# Altium PCB ActuatorBoard.PcbDoc
Units mil, origin at the board's own origin, x right, y up, seen from the top; angles counter-clockwise.
Board outline 3130 x 1655 mil, 4 copper layers (Top, InternalPlane1, InternalPlane2, Bottom), stack 61.7 mil thick; 85 components, 70 nets, 361 pads, 135 vias.
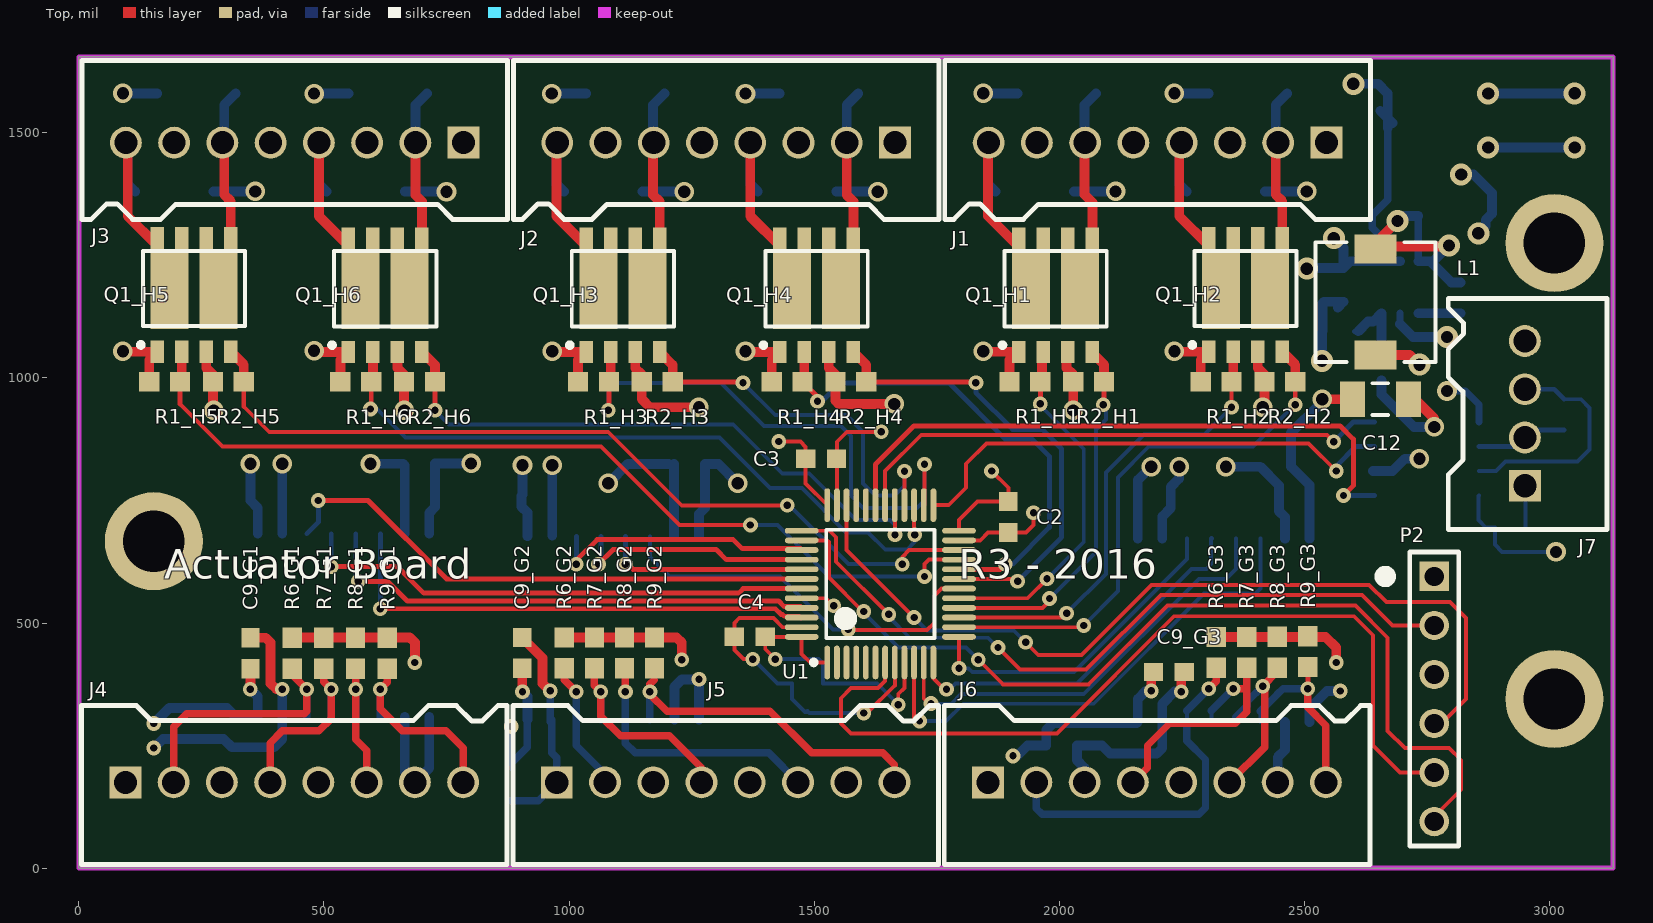
[diagram p0: Top view]
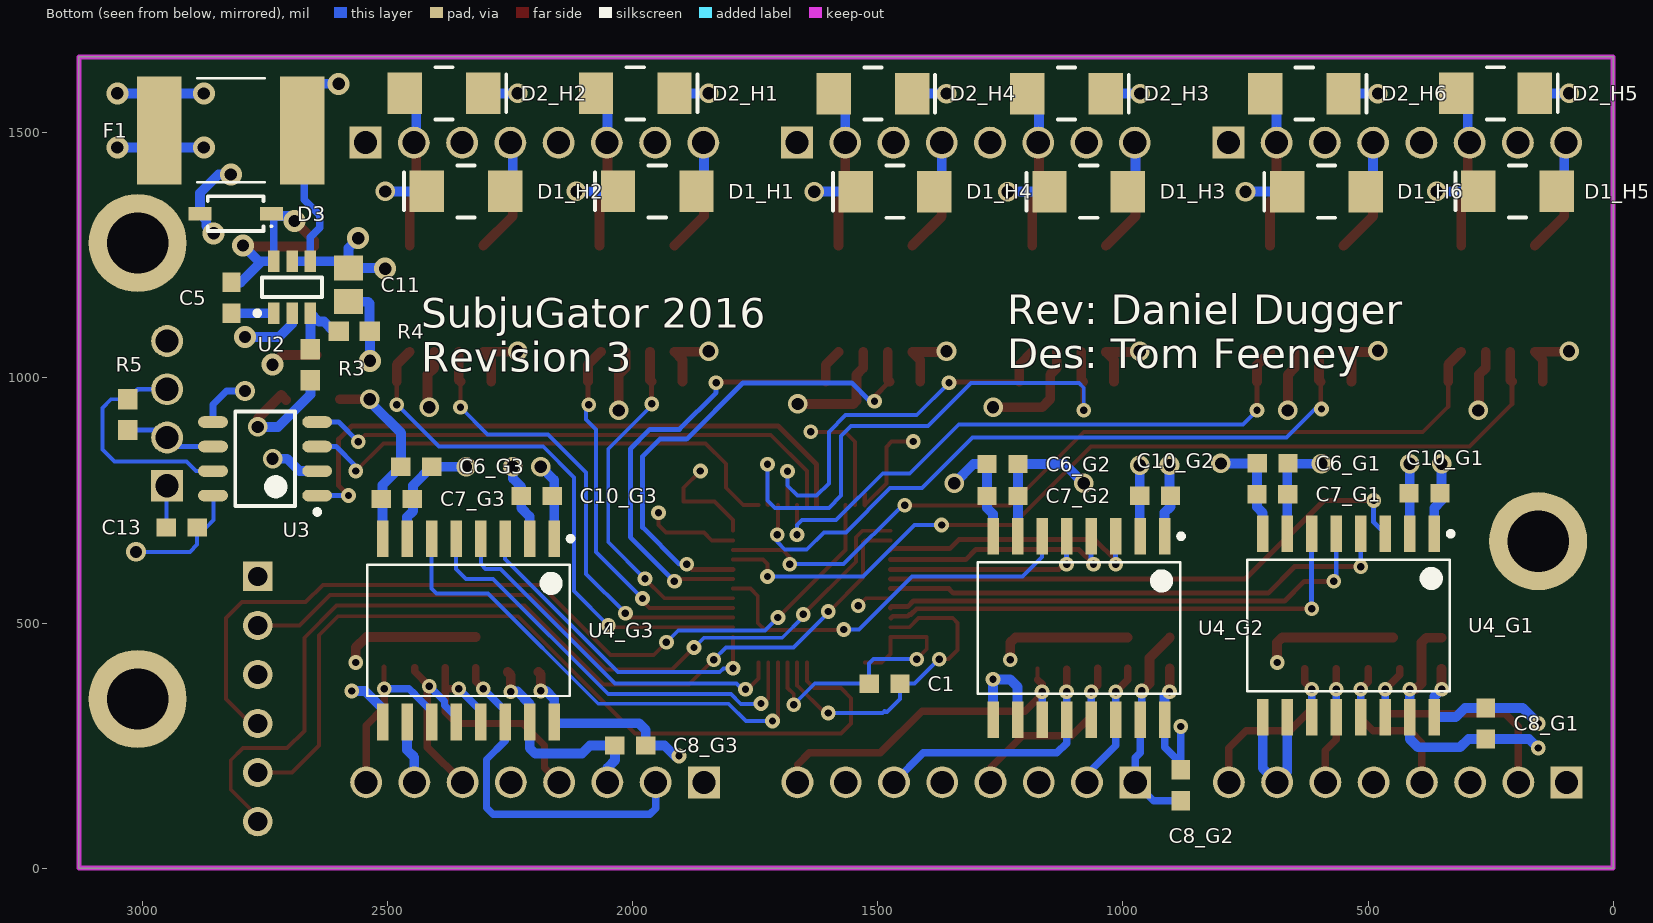
[diagram p1: Bottom view, seen from below]
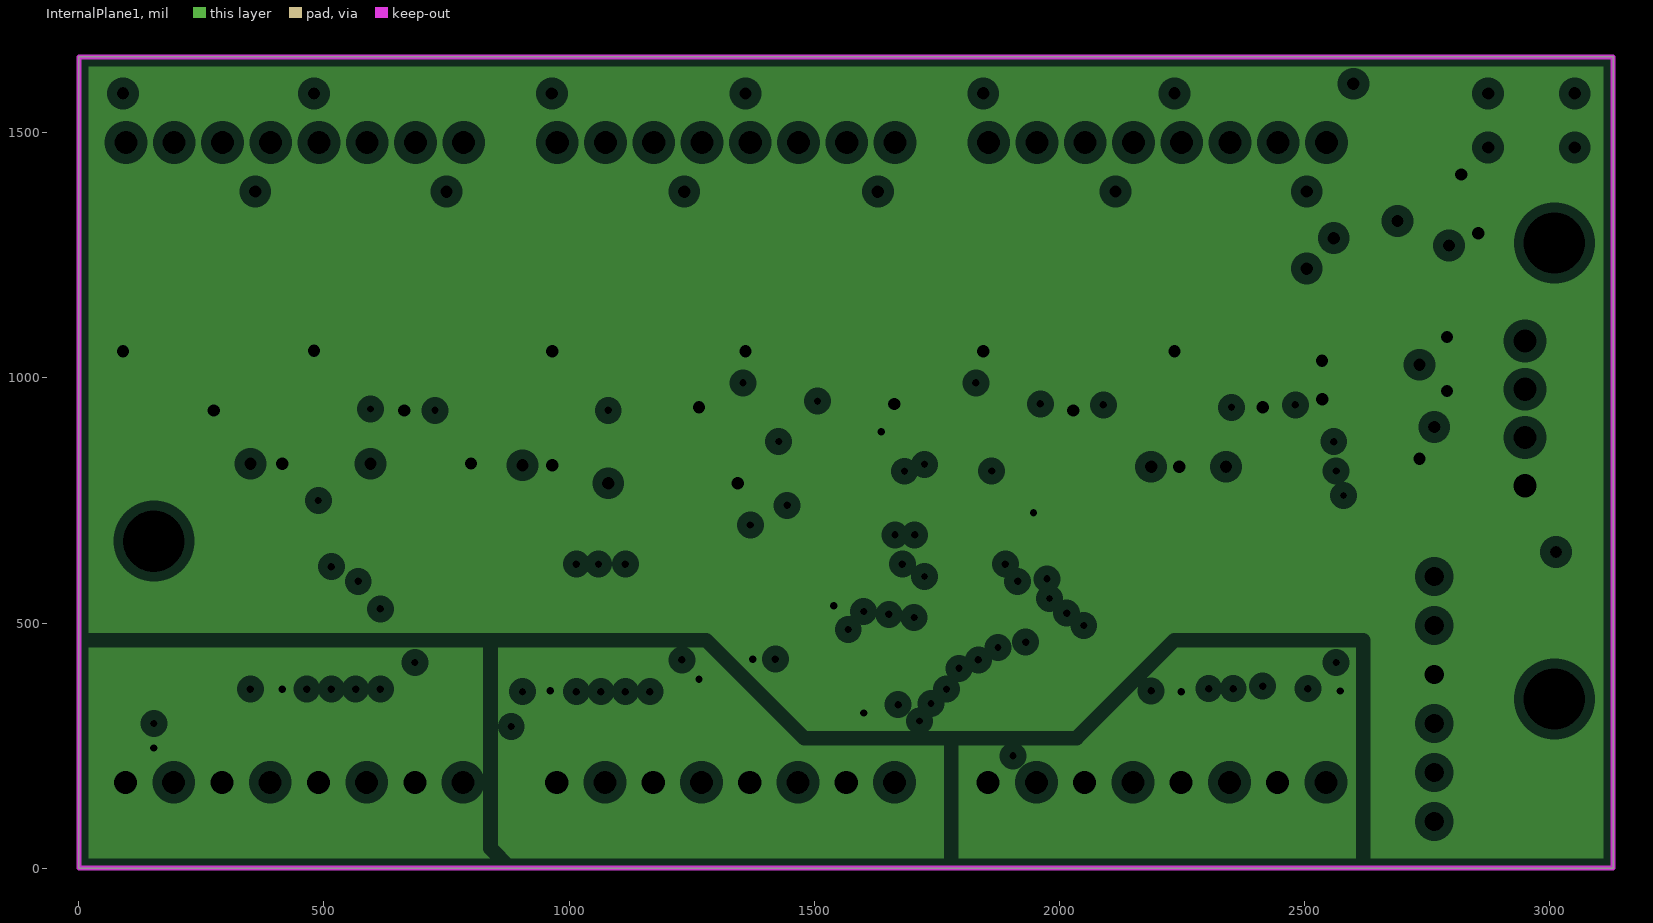
[diagram p2: InternalPlane1, clearances drawn from the general rule]
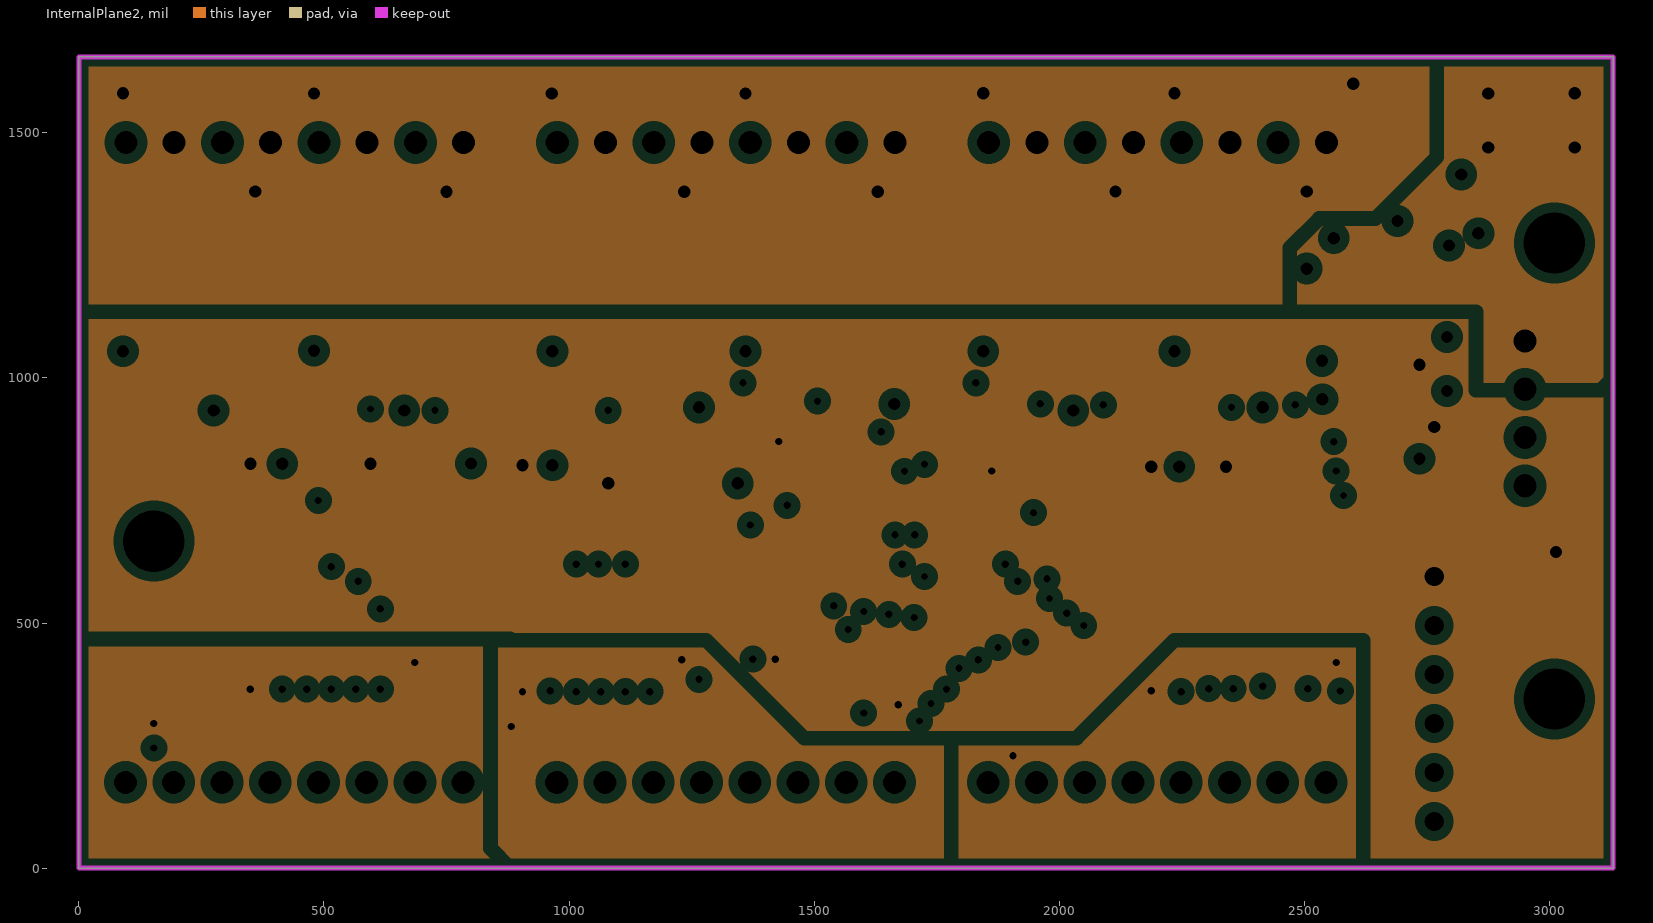
[diagram p3: InternalPlane2, clearances drawn from the general rule]

## Layer stack, top to bottom
Top Solder: solder mask 0.4, Solder Resist, Dk 3.5
Top: signal copper 0.675
Dielectric 1: prepreg 9.5, FR-4, Dk 4.2
InternalPlane1: plane copper 0.675, net (Multiple Nets)
Dielectric 3: core 40, FR-4, Dk 4.2
InternalPlane2: plane copper 0.675, net (Multiple Nets)
Dielectric 4: prepreg 9.5, FR-4, Dk 4.2
Bottom: signal copper 0.675
Bottom Solder: solder mask 0.4, Solder Resist, Dk 3.5

## Board outline
0,0 0,1655 3130,1655 3130,0

## Design rules (kind name [scope] priority, off if disabled: settings)
Clearance InnerClearance [(OnLayer('Ground Plane') OR OnLayer('Power Plane'))] p1: gap=12 ignorepadtopadclearanceinfootprint=FALSE except(0: Arc-Hole Track-Hole SMDPad-Hole THPad-Hole Via-Hole Fill-Hole Poly-Hole Region-Hole Text-Hole)
Clearance ViaClearance [IsVia vs IsVia] p2: gap=10 ignorepadtopadclearanceinfootprint=FALSE except(0: Arc-Hole Track-Hole SMDPad-Hole THPad-Hole Via-Hole Fill-Hole Poly-Hole Region-Hole Text-Hole)
Clearance AllClearance [All] p3: gap=6 ignorepadtopadclearanceinfootprint=FALSE except(0: Arc-Hole Track-Hole SMDPad-Hole THPad-Hole Via-Hole Fill-Hole Poly-Hole Region-Hole Text-Hole)
DiffPairsRouting [(InDifferentialPairClass('All Differential Pairs'))] p1: maxlimit=10 minlimit=6 mostfreqgap=6 toplayer_minwidth=6 toplayer_maxwidth=12 toplayer_prefwidth=10.9 bottomlayer_minwidth=6 bottomlayer_maxwidth=12 bottomlayer_prefwidth=10.9 maxuncoupledlength=500
HoleSize [All] p1: absolutevalues=TRUE maxlimit=250 minlimit=13 maxpercent=80.000 minpercent=20.000
HoleToHoleClearance [All] p1: gap=7 allowstackedmicrovias=FALSE
MinimumAnnularRing [All] p1: minimumring=7
MinimumSolderMaskSliver [All] p1 off: minsoldermaskwidth=10
PlaneClearance [All] p1: clearance=20
PlaneConnect [All] p1: planeconnectstyle=Relief reliefexpansion=8 reliefentries=4 reliefconductorwidth=15 reliefairgap=8
PolygonConnect [All] p1: connectstyle=Relief reliefconductorwidth=10 reliefentries=4 polygonreliefangle="90 Angle" airgapwidth=10
RoomDefinition G3 [InComponentClass('G3')] p1: confinementstyle=ConfineIn formatcopy=TRUE lockcomponents=FALSE outline 1924.75,877.69 1924.75,205 2565.31,205 2565.31,877.69
RoomDefinition G2 [InComponentClass('G2')] p2: confinementstyle=ConfineIn formatcopy=TRUE lockcomponents=FALSE outline 822.46,878.42 822.46,84.48 1315.31,84.48 1315.31,878.42
RoomDefinition G1 [InComponentClass('G1')] p3: confinementstyle=ConfineIn formatcopy=TRUE lockcomponents=FALSE outline 209.63,878.42 209.63,215 775.31,215 775.31,878.42
RoomDefinition H6 [InComponentClass('H6')] p4: confinementstyle=ConfineIn formatcopy=TRUE lockcomponents=FALSE outline 465,930 810,930 810,1655 465,1655
RoomDefinition H5 [InComponentClass('H5')] p5: confinementstyle=ConfineIn formatcopy=TRUE lockcomponents=FALSE outline 75,930.43 420,930.43 420,1655.43 75,1655.43
RoomDefinition H4 [InComponentClass('H4')] p6: confinementstyle=ConfineIn formatcopy=TRUE lockcomponents=FALSE outline 1345,930 1690,930 1690,1655 1345,1655
RoomDefinition H3 [InComponentClass('H3')] p7: confinementstyle=ConfineIn formatcopy=TRUE lockcomponents=FALSE outline 950,930 1295,930 1295,1655 950,1655
RoomDefinition H2 [InComponentClass('H2')] p8: confinementstyle=ConfineIn formatcopy=TRUE lockcomponents=FALSE outline 2220,930.43 2565,930.43 2565,1655.43 2220,1655.43
RoomDefinition H1 [InComponentClass('H1')] p9: confinementstyle=ConfineIn formatcopy=TRUE lockcomponents=FALSE outline 1830,930.43 2175,930.43 2175,1655.43 1830,1655.43
RoutingVias [All] p1: holewidth=15 width=25 viastyle="Through Hole" minholewidth=15 minwidth=25 maxholewidth=28 maxwidth=50
SilkToSilkClearance [All] p1: silktosilkclearance=5
SilkToSolderMaskClearance [IsPad] p1 off: minsilkscreentomaskgap=10 clearancetoexposedcopper=TRUE
SolderMaskExpansion [All] p1: expansion=4 useseparateexpansions=TRUE expansionbottom=4
Width [All] p1: maxlimit=20 minlimit=6 preferedwidth=8
22 further rules are at their usual default settings.

## Classes and differential pairs
net class A[11..0]: A0 A1 A2 A3 A4 A5 A6 A7 A8 A9 A10 A11
component class G1: C6_G1 C7_G1 C8_G1 C9_G1 C10_G1 R6_G1 R7_G1 R8_G1 R9_G1 U4_G1
component class H1: D1_H1 D2_H1 Q1_H1 R1_H1 R2_H1
component class H2: D1_H2 D2_H2 Q1_H2 R1_H2 R2_H2
channel class DualDriver: H1 H2 H3 H4 H5 H6
component class ActuatorTop: C1 C2 C3 C4 C5 C11 C12 C13 D3 F1 J1 J2 J3 J4 J5 J6 J7 L1 P2 R3 R4 R5 U1 U2 U3
component class H3: D1_H3 D2_H3 Q1_H3 R1_H3 R2_H3
component class H4: D1_H4 D2_H4 Q1_H4 R1_H4 R2_H4
component class H5: D1_H5 D2_H5 Q1_H5 R1_H5 R2_H5
component class H6: D1_H6 D2_H6 Q1_H6 R1_H6 R2_H6
component class G2: C6_G2 C7_G2 C8_G2 C9_G2 C10_G2 R6_G2 R7_G2 R8_G2 R9_G2 U4_G2
channel class Isolator: G1 G2 G3
net class B[11..0]: B0 B1 B2 B3 B4 B5 B6 B7 B8 B9 B10 B11
component class G3: C6_G3 C7_G3 C8_G3 C9_G3 C10_G3 R6_G3 R7_G3 R8_G3 R9_G3 U4_G3

## Components (designator, comment, footprint, x,y, rotation, side; value= is the part's Value field where it differs from the comment)
C1 "Cap" CAPC0603 1486.31,376.26 r180 bottom
C2 "Cap" CAPC0603 1896.07,716.26 r270 top
C3 "Cap" CAPC0603 1514.31,835.2 r0 top
C4 "Cap" CAPC0603 1368.7,471.73 r180 top
C5 "Cap" CAPC0603 2818.52,1163.37 r90 bottom
C6_G1 "Cap" CAPC0603 694.78,825.6 r180 bottom (schematic designator C6)
C6_G2 "Cap" CAPC0603 1245.78,824.46 r180 bottom (schematic designator C6)
C6_G3 "Cap" CAPC0603 2441.57,818.9 r180 bottom (schematic designator C6)
C7_G1 "Cap" CAPC0603 695.22,762.39 r180 bottom (schematic designator C7)
C7_G2 "Cap" CAPC0603 1245.78,758.99 r180 bottom (schematic designator C7)
C7_G3 "Cap" CAPC0603 2481.5,753 r180 bottom (schematic designator C7)
C8_G1 "Cap" CAPC0603 260,295 r90 bottom (schematic designator C8)
C8_G2 "Cap" CAPC0603 882.14,169.1 r90 bottom (schematic designator C8)
C8_G3 "Cap" CAPC0603 2005,250 r180 bottom (schematic designator C8)
C9_G1 "Cap" CAPC0603 350.21,438.33 r270 top (schematic designator C9)
C9_G2 "Cap" CAPC0603 904.38,439.01 r270 top (schematic designator C9)
C9_G3 "Cap" CAPC0603 2223.7,400.1 r180 top (schematic designator C9)
C10_G1 "Cap" CAPC0603 384.88,765.01 r0 bottom (schematic designator C10)
C10_G2 "Cap" CAPC0603 934.47,759.44 r0 bottom (schematic designator C10)
C10_G3 "Cap" CAPC0603 2195.98,758.99 r0 bottom (schematic designator C10)
C11 "Cap" CAPC0805 2580,1190 r90 bottom
C12 "Cap" CAPC1206 2655,956.5 r0 top
C13 "Cap" CAPC0603 2920,695 r0 bottom
D1_H1 "Schottky" SS110-TP 1950,1380.43 r180 bottom (schematic designator D1)
D1_H2 "Schottky" SS110-TP 2340,1380.43 r180 bottom (schematic designator D1)
D1_H3 "Schottky" SS110-TP 1070,1380 r180 bottom (schematic designator D1)
D1_H4 "Schottky" SS110-TP 1465,1380 r180 bottom (schematic designator D1)
D1_H5 "Schottky" SS110-TP 195,1380.43 r180 bottom (schematic designator D1)
D1_H6 "Schottky" SS110-TP 585,1380 r180 bottom (schematic designator D1)
D2_H1 "Schottky" SS110-TP 1995,1580.43 r0 bottom (schematic designator D2)
D2_H2 "Schottky" SS110-TP 2385,1580.43 r0 bottom (schematic designator D2)
D2_H3 "Schottky" SS110-TP 1115,1580 r0 bottom (schematic designator D2)
D2_H4 "Schottky" SS110-TP 1510,1580 r0 bottom (schematic designator D2)
D2_H5 "Schottky" SS110-TP 240,1580.43 r0 bottom (schematic designator D2)
D2_H6 "Schottky" SS110-TP 630,1580 r0 bottom (schematic designator D2)
D3 "Schottky" 1N5819HW-7-F 2810,1335 r0 bottom
F1 "PTC Fuse" PTC7451X11N 2820,1505 r180 bottom
J1 "MCV_0,5/8-G-2,5" MCV_0,5/8-G-2,5 2545,1480 r180 top
J2 "MCV_0,5/8-G-2,5" MCV_0,5/8-G-2,5 1665,1480 r180 top
J3 "MCV_0,5/8-G-2,5" MCV_0,5/8-G-2,5 785,1480 r180 top
J4 "MCV_0,5/8-G-2,5" MCV_0,5/8-G-2,5 95,175 r0 top
J5 "MCV_0,5/8-G-2,5" MCV_0,5/8-G-2,5 975,175 r0 top
J6 "MCV_0,5/8-G-2,5" MCV_0,5/8-G-2,5 1855,175 r0 top
J7 "MCV_0,5/4-G-2,5" MCV_0,5/4-G-2,5 2950,780 r90 top
L1 "Inductor" INDP6060X48N 2645.16,1154.74 r270 top
P2 "SWD" SWD_STM32 2765,595 r0 top
Q1_H1 "BUK9K134-100EX" NXP_SOT1205 1992.58,1181.97 r90 top (schematic designator Q1)
Q1_H2 "BUK9K134-100EX" NXP_SOT1205 2380,1182.4 r90 top (schematic designator Q1)
Q1_H3 "BUK9K134-100EX" NXP_SOT1205 1110,1181.97 r90 top (schematic designator Q1)
Q1_H4 "BUK9K134-100EX" NXP_SOT1205 1505,1181.97 r90 top (schematic designator Q1)
Q1_H5 "BUK9K134-100EX" NXP_SOT1205 235,1182.4 r90 top (schematic designator Q1)
Q1_H6 "BUK9K134-100EX" NXP_SOT1205 625,1181.97 r90 top (schematic designator Q1)
R1_H1 "Res" RES0603 1930,992.4 r180 top (schematic designator R1)
R1_H2 "Res" RES0603 2320,992.4 r180 top (schematic designator R1)
R1_H3 "Res" RES0603 1050,991.97 r180 top (schematic designator R1)
R1_H4 "Res" RES0603 1445,991.97 r180 top (schematic designator R1)
R1_H5 "Res" RES0603 175,992.4 r180 top (schematic designator R1)
R1_H6 "Res" RES0603 565,991.97 r180 top (schematic designator R1)
R2_H1 "Res" RES0603 2060,992.4 r180 top (schematic designator R2)
R2_H2 "Res" RES0603 2450,992.4 r180 top (schematic designator R2)
R2_H3 "Res" RES0603 1180,991.97 r180 top (schematic designator R2)
R2_H4 "Res" RES0603 1575,991.97 r180 top (schematic designator R2)
R2_H5 "Res" RES0603 305,992.4 r180 top (schematic designator R2)
R2_H6 "Res" RES0603 695,991.97 r180 top (schematic designator R2)
R3 "Res" RES0603 2657.6,1026.91 r270 bottom
R4 "Res" RES0603 2568.27,1095 r180 bottom
R5 "Res" RES0603 3030,925 r270 bottom
R6_G1 "Res" RES0603 435.25,438.33 r270 top (schematic designator R6)
R6_G2 "Res" RES0603 990.49,439.01 r270 top (schematic designator R6)
R6_G3 "Res" RES0603 2320.16,440.13 r270 top (schematic designator R6)
R7_G1 "Res" RES0603 499.82,438.33 r270 top (schematic designator R7)
R7_G2 "Res" RES0603 1051.79,439.01 r270 top (schematic designator R7)
R7_G3 "Res" RES0603 2382.49,440.13 r270 top (schematic designator R7)
R8_G1 "Res" RES0603 564.39,438.33 r270 top (schematic designator R8)
R8_G2 "Res" RES0603 1113.09,439.01 r270 top (schematic designator R8)
R8_G3 "Res" RES0603 2444.82,440.25 r270 top (schematic designator R8)
R9_G1 "Res" RES0603 628.96,438.33 r270 top (schematic designator R9)
R9_G2 "Res" RES0603 1174.38,439.01 r270 top (schematic designator R9)
R9_G3 "Res" RES0603 2507.14,441.58 r270 top (schematic designator R9)
U1 "STM32F072CB" STM32F072CB 1635,580 r90 top
U2 "LMR14203" SOT95P280X110-6N 2695,1185 r90 bottom
U3 "MAX14840EASA+" MAX14840EASA+ 2750,835 r0 bottom
U4_G1 "ADUM6404" SOIC127P1030X265-16N 540,495 r270 bottom (schematic designator U4)
U4_G2 "ADUM6404" SOIC127P1030X265-16N 1090,490 r270 bottom (schematic designator U4)
U4_G3 "ADUM6404" SOIC127P1030X265-16N 2335.31,485 r270 bottom (schematic designator U4)

## Footprints (in the part's own frame and the unit in brackets; to place one, negate y for a bottom-side part, rotate by r counter-clockwise, add the part's x,y. Pads: shape width x height; smd on the part's side, far side on the other; paste and mask are expansions set on the pad)
1N5819HW-7-F [mm] "DIODE SCHOTTKY 40V 1A SOD123"
  rect 1.2x0.7 smd: A(1.85,0) C(-1.85,0)
  silkscreen extent -1.9,-0.9 1.45,0.9, body extent -1.42,-0.85 1.43,0.85, height 1.35
CAPC0603 [mm] "Chip Capacitor, 2-Leads, Body 1.60x0.80mm, IPC Medium Density"
  rect 1x0.95 smd: 1(-0.8,0) 2(0.8,0)
  body extent -0.88,-0.48 0.87,0.48, height 0.8
CAPC0805 [mm] "Chip Capacitor, 2-Leads, Body 2.01x1.25mm, IPC Medium Density"
  rect 1.3x1.5 smd: 1(-0.875,0) 2(0.875,0)
  body extent -1.1,-0.72 1.11,0.72, height 1.8
CAPC1206 [mm] "Chip Capacitor, 2-Leads, Body 3.20x1.60mm, IPC Medium Density"
  rect 1.3x1.85 smd: 1(-1.45,0) 2(1.45,0)
  silkscreen extent -0.4,-0.82 0.4,0.82, body extent -1.7,-0.9 1.7,0.9, height 1.8
INDP6060X48N [mm] "Precision Wire Wound Inductor, 2-Leads, Body 6.00x6.00mm, IPC Medium Density"
  rect 1.5x2.2 smd: 1(-2.75,0) 2(2.75,0)
  silkscreen extent -3.1,-3.1 3.1,3.1, body extent -3.1,-3.1 3.1,3.1, height 4.8
MAX14840EASA+ [mm] "SOIC, 8-Leads, Body 4.90x3.90mm, Pitch 1.27mm, IPC Medium Density"
  oval 1.55x0.6 smd: 1(-2.7,1.905) 2(-2.7,0.635) 3(-2.7,-0.635) 4(-2.7,-1.905) 5(2.7,-1.905) 6(2.7,-0.635) 7(2.7,0.635) 8(2.7,1.905)
  silkscreen extent -2.82,-2.45 1.55,2.88, body extent -1.95,-2.45 1.95,2.45, height 1.75
MCV_0,5/4-G-2,5 [mil] "CONN TERM BLOCK 2.50MM 4POS"
  rect 65x65 hole 47.24: 1(0,0)
  round 65 hole 47.24: 2(98.43,0) 3(196.85,0) 4(295.28,0)
  silkscreen extent -90,-167 382,156, body extent -87,-165 382,154, height 398
MCV_0,5/8-G-2,5 [mil] "CONN TERM BLOCK 2.50MM 8POS"
  rect 65x65 hole 47.24: 1(0,0)
  round 65 hole 47.24: 2(98.43,0) 3(196.85,0) 4(295.28,0) 5(393.7,0) 6(492.13,0) 7(590.55,0) 8(688.98,0)
  silkscreen extent -90,-167 779,156, body extent -87,-165 776,154, height 398
NXP_SOT1205 [mm] "TSOP, 8-Leads, Body 5.13x4.58mm, Pitch 1.27mm, Thermal Pad 2.00x2.00mm, IPC Medium Density"
  rect 1.15x0.7 smd: 1(-3.275,1.905) 2(-3.275,0.635) 3(-3.275,-0.635) 4(-3.275,-1.905)
  rect 1.9x0.7 smd: 5(2.225,-1.905) 6(2.225,-0.635) 7(2.225,0.635) 8(2.225,1.905)
  rect 4.1x1.97 smd: 6(-0.05,-1.27) 8(-0.05,1.27)
  silkscreen extent -3.05,-2.65 1.95,2.88, body extent -2.35,-2.65 2.35,2.65, height 1.05
PTC7451X11N [mm] "Chip PTC, 2920, 7351 metric 2-Leads, Body 7.36x5.12mm, IPC Medium Density"
  rect 2.3x5.6 smd: 1(-3.7,0) 2(3.7,0)
  silkscreen extent -1.75,-2.7 1.75,2.7, body extent -3.99,-2.72 3.99,2.72, height 1.15
RES0603 [mm] "Chip Resistor, 2-Leads, Body 1.60x0.80mm, IPC Medium Density"
  rect 1.05x1 smd: 1(-0.8,0) 2(0.8,0)
  body extent -0.88,-0.48 0.87,0.47, height 0.8
SOIC127P1030X265-16N [mm] "SOIC, 16-Leads, Body 10.30x7.50mm, Pitch 1.27mm, IPC Medium Density"
  rect 1.9x0.6 smd: 1(-4.75,4.445) 2(-4.75,3.175) 3(-4.75,1.905) 4(-4.75,0.635) 5(-4.75,-0.635) 6(-4.75,-1.905) 7(-4.75,-3.175) 8(-4.75,-4.445) 9(4.75,-4.445) 10(4.75,-3.175) 11(4.75,-1.905) 12(4.75,-0.635) 13(4.75,0.635) 14(4.75,1.905) 15(4.75,3.175) 16(4.75,4.445)
  silkscreen extent -4.87,-5.25 3.4,5.42, body extent -3.8,-5.25 3.8,5.25, height 2.65
SOT95P280X110-6N [mm] "SOT23, 6-Leads, Body 2.90x2.80mm, Pitch 0.95mm, IPC Medium Density"
  rect 1.1x0.6 smd: 1(-1.35,0.95) 2(-1.35,0) 3(-1.35,-0.95) 4(1.35,-0.95) 5(1.35,0) 6(1.35,0.95)
  silkscreen extent -1.47,-1.55 0.5,1.93, body extent -0.87,-1.52 0.87,1.53, height 1.1
SS110-TP [mil] "DIODE SCHOTTKY 100V 1A SMA"
  rect 70x85 smd: A(80,0) C(-80,0)
  silkscreen extent -127,-53 18,53, body extent -84,-52 84,52, height 116
STM32F072CB [mm] "TSQFP, 48-Leads, Body 7.00x7.00mm, Pitch 0.50mm, IPC Medium Density"
  oval 1.75x0.3 smd: 1(-4.075,2.75) 2(-4.075,2.25) 3(-4.075,1.75) 4(-4.075,1.25) 5(-4.075,0.75) 6(-4.075,0.25) 7(-4.075,-0.25) 8(-4.075,-0.75) 9(-4.075,-1.25) 10(-4.075,-1.75) 11(-4.075,-2.25) 12(-4.075,-2.75) 25(4.075,-2.75) 26(4.075,-2.25) 27(4.075,-1.75) 28(4.075,-1.25) 29(4.075,-0.75) 30(4.075,-0.25) 31(4.075,0.25) 32(4.075,0.75) 33(4.075,1.25) 34(4.075,1.75) 35(4.075,2.25) 36(4.075,2.75)
  oval 0.3x1.75 smd: 13(-2.75,-4.075) 14(-2.25,-4.075) 15(-1.75,-4.075) 16(-1.25,-4.075) 17(-0.75,-4.075) 18(-0.25,-4.075) 19(0.25,-4.075) 20(0.75,-4.075) 21(1.25,-4.075) 22(1.75,-4.075) 23(2.25,-4.075) 24(2.75,-4.075) 37(2.75,4.075) 38(2.25,4.075) 39(1.75,4.075) 40(1.25,4.075) 41(0.75,4.075) 42(0.25,4.075) 43(-0.25,4.075) 44(-0.75,4.075) 45(-1.25,4.075) 46(-1.75,4.075) 47(-2.25,4.075) 48(-2.75,4.075)
  silkscreen extent -4.2,-2.8 2.8,3.57, body extent -3.5,-3.5 3.5,3.5, height 1.6
SWD_STM32 [mil] "SWD connector matching the pinout on STM Discovery Boards"
  rect 60x60 hole 39.37: 1(0,0)
  round 60 hole 39.37: 2(0,-100) 3(0,-200) 4(0,-300) 5(0,-400) 6(0,-500)
  silkscreen extent -110,-550 50,50

## Part data
D1_H1 D1_H2 D1_H3 D1_H4 D1_H5 D1_H6 D2_H1 D2_H2 D2_H3 D2_H4 D2_H5 D2_H6 D3: "Schottky Diode Template"
F1: library part PTC_Fuse
J1 J2 J3 J4 J5 J6: "CONN TERM BLOCK 2.50MM 8POS, Vertical, Through-Hole, 4A"
J7: "CONN TERM BLOCK 2.50MM 4POS, Vertical, Through-Hole, 4A"
P2: library part SWD_STM32, "SWD connector matching the pinout on STM Discovery Boards"
Q1_H1 Q1_H2 Q1_H3 Q1_H4 Q1_H5 Q1_H6: "MOSFET DUAL N-CH 100V 8.5A SOT1205"
U1: "MCU 32BIT 128KB FLASH 48LQFP"
U2: "Simple Switcher 42Vin 0.3A Step-Down Voltage Regulator"
U3: "TXRX 40MBPS RS485/RS422 8-SOIC"
U4_G1 U4_G2 U4_G3: "Digital Isolator, 4 channel, with isolated power"

## Free pads (board coordinates)
  round 200 hole 125: 0(153,667) 0(3010,345) 0(3010,1275)

## Via types
v1: diameter 30, hole 15, Top to Bottom, tented both sides, 81 vias
v2: diameter 40, hole 25, Top to Bottom, tented both sides, 40 vias
v3: diameter 45, hole 25, Top to Bottom, tented both sides, 14 vias

## Nets (pads, with @x,y where several pads share a name; then routed paths per layer and width w, separated by ;. In a path a pad name is that pad's centre, name@x,y a point inside that pad or via, vN(x,y) a via of type N, cw(c..) or ccw(c..) an arc to the next point about the centre after c; other vN are vias at no path point)
3.3V: C1.1 C2.1 C3.1 C4.1 C6_G1.2 C6_G2.2 C6_G3.2 C7_G1.2 C7_G2.2 C7_G3.2 C10_G1.1 C10_G2.1 C10_G3.1 C12.2 C13.1 L1.2 P2.1 R3.2 U1.1 U1.9 U1.24 U1.36 U1.48 U3.8 U4_G1.1 U4_G1.7 U4_G2.1 U4_G2.7 U4_G3.1 U4_G3.7 | length 2869.3
  Top w8: v1(1420.96,426.18) 1400.2,446.94 C4.1 U1.48 1474.57,437.01 1492.01,419.57 U1.1 ; v1(1427.59,870.39) 1471.79,870.39 1482.81,859.37 C3.1 1482.81,784.35 U1.36 ; v1(1671.51,333.47) 1671.51,355 1684.21,367.7 U1.9 ; U1.24 1795.43,710 1833.19,747.76 C2.1 1896.07,775.89 v1(1861.97,810)
  Top w10: U1.36 U1.36@1526.73,763.27
  Top w20: L1.2 2715.17,1046.47 v3(2734.73,1026.91) ; C12.2@2707.09,955 2717.09,965 2765,917.09 v2(2765,899.97)
  Bottom w8: C6_G1.2@661.95,824.84 C6_G1.2@665,821.79 ; U4_G2.7@1214.29,677.72 U4_G2.7 ; v1(1420.96,426.18) 1508.68,426.18 1517.8,417.06 C1.1 1628.72,376.26 v1(1671.51,333.47) ; U3.8 2855,758.7 2855,710 2870,695 C13.1 2888.5,660 2903.45,645.05 v2(3013.25,645.05)
  Bottom w20: v2(350,824.84) 350,750 365,735 U4_G1.1 ; v2(595,824.84) C6_G1.2@661.95,824.84 ; U4_G1.7 C6_G1.2@665,821.79 ; C10_G2.1 902.97,737.22 915,725.2 U4_G2.1 ; C10_G2.1@905,761.46 v2(905,821.79) ; v2(1080,785) 1119.69,824.69 C6_G2.2@1203.5,824.69 ; U4_G2.7@1214.29,677.72 C7_G2.2 C6_G2.2 ; U4_G3.1 2160.31,791.69 v2(2187.52,818.9) ; v2(2340,818.9) C6_G3.2 2448.5,780.47 2448.5,728.05 2460.31,716.23 U4_G3.7 ; R3.2 2657.6,966.27 2723.89,899.97 v2(2765,899.97)
A0: J4.2 R6_G1.2 U4_G1.14 | length 554.2
  Top w15: J4.2 193.42,288.42 220,315 460,315 465,320 v1(465,365) 435.25,394.75 R6_G1.2
  Bottom w15: U4_G1.14 v1(465,365)
A1: J4.4 R7_G1.2 U4_G1.13 | length 395.7
  Top w15: J4.4 390.28,255.28 415,280 490,280 515,305 v1(515,365) 499.82,380.18 R7_G1.2
  Bottom w10: v1(515,365) v1@515,370
  Bottom w15: U4_G1.13 v1(515,365)
A2: J4.6 R8_G1.2 U4_G1.12 | length 298.3
  Top w8: R8_G1.2 R8_G1.2@564.66,406.56
  Top w15: R8_G1.2@564.66,406.56 v1(564.66,365) 564.66,262.46 587.13,240 J4.6
  Bottom w15: U4_G1.12 v1@565,365
A3: J4.8 R9_G1.2 U4_G1.11 | length 421.8
  Top w15: R9_G1.2 628.96,378.96 v1(615,365) 615,324.87 659.87,280 748.98,280 783.98,245 J4.8
  Bottom w10: v1(615,365) v1@615,370
  Bottom w15: U4_G1.11 v1(615,365)
A4: J5.2 R6_G2.2 U4_G2.14 | length 266.9
  Top w15: R6_G2.2 990.49,384.51 v1(1015,360)
  Bottom w15: v1(1015,360) U4_G2.14 1015,250 1073.42,191.57 J5.2
A5: J5.4 R7_G2.2 U4_G2.13 | length 438.6
  Top w15: R7_G2.2 1051.79,373.21 v1(1065,360) 1065,310 1105,270 1205,270 1270.28,204.72 J5.4
  Bottom w15: U4_G2.13 v1(1065,360)
A6: J5.6 R8_G2.2 U4_G2.12 | length 535.9
  Top w15: v1(1115,360) R8_G2.2@1115,405.6
  Bottom w15: v1(1115,360) U4_G2.12 1115,255 1135,235 1407.13,235 J5.6
A7: J5.8 R9_G2.2 U4_G2.11 | length 703
  Top w8: 1174.38,384.38 R9_G2.2
  Top w15: 1174.38,384.38 1165,375 v1(1165,360) 1165,355 1200,320 1410,320 1495,235 1640,235 1663.98,211.02 J5.8
  Bottom w15: U4_G2.11 v1@1165,355
A8: J6.2 R6_G3.2 U4_G3.14 | length 734.5
  Top w15: v1(2305,366) 2320.16,381.16 R6_G3.2
  Bottom w8: U4_G3.14 U4_G3.14@2260.31,321.31
  Bottom w15: J6.2 1953.42,121.57 1965,110 2285,110 2298.37,123.37 2298.37,221.63 2260.31,259.68 U4_G3.14 ; U4_G3.14@2260.31,321.31 v1(2305,366)
A9: J6.4 R7_G3.2 U4_G3.13 | length 519.9
  Top w15: J6.4 2180,204.72 2180,250 2225,295 2358.96,295 2382.49,318.53 R7_G3.2 ; v1(2355,366) 2380.07,366
  Bottom w8: U4_G3.13 U4_G3.13@2310.31,321.31
  Bottom w15: U4_G3.13@2310.31,321.31 v1(2355,366)
A10: J6.6 R8_G3.2 U4_G3.12 | length 373.4
  Top w8: 2419,246.87 2419,248.87
  Top w15: J6.6 2419,246.87 ; 2419,248.87 2419,367.05 v1(2414.89,371.16) 2444.82,401.09 R8_G3.2
  Bottom w8: U4_G3.12 U4_G3.12@2360.31,308.16
  Bottom w15: U4_G3.12@2360.31,308.16 2384.18,332.02 2384.18,340.45 v1(2414.89,371.16)
A11: J6.8 R9_G3.2 U4_G3.11 | length 388.2
  Top w10: v1(2507.14,366) R9_G3.2
  Top w15: v1(2507.14,366) 2507.14,327.85 2543.98,291.02 J6.8
  Bottom w8: U4_G3.11 U4_G3.11@2410.31,319.76
  Bottom w15: U4_G3.11@2410.31,319.76 2429.55,339 2429.77,339 2445,354.23 2445,354.45 2456.55,366 2464.97,366 v1(2507.14,366)
ACT0: D1_H1.A J1.8 Q1_H1.7 Q1_H1.8 | length 341.7
  Top w20: J1.8@1854.72,1480.43 1854.72,1330.28 Q1_H1.8@1915,1270
  Bottom w20: J1.8@1854.72,1480.43 1854.72,1395.71 D1_H1.A
ACT1: D2_H1.A J1.6 Q1_H1.5 Q1_H1.6 | length 327.2
  Top w20: J1.6@2051.57,1480.43 2051.57,1373.86 2067.58,1357.86 Q1_H1.5
  Bottom w20: J1.6@2051.57,1480.43 2051.57,1557.01 D2_H1.A
ACT2: D1_H2.A J1.4 Q1_H2.7 Q1_H2.8 | length 341.7
  Top w20: J1.4@2244.72,1480.43 2244.72,1330.28 Q1_H2.8@2305,1270
  Bottom w20: J1.4@2244.72,1480.43 2244.72,1395.71 D1_H2.A
ACT3: D2_H2.A J1.2 Q1_H2.5 Q1_H2.6 | length 325.7
  Top w20: J1.2@2441.57,1480.43 2441.57,1373.86 2455,1360.43 Q1_H2.5
  Bottom w20: J1.2@2441.57,1480.43 2441.57,1557.01 D2_H2.A
ACT4: D1_H3.A J2.8 Q1_H3.7 Q1_H3.8 | length 341.7
  Top w20: J2.8@974.72,1480 974.72,1329.84 Q1_H3.8@1035,1269.57
  Bottom w20: J2.8@974.72,1480 974.72,1395.28 D1_H3.A
ACT5: D2_H3.A J2.6 Q1_H3.5 Q1_H3.6 | length 325.7
  Top w20: J2.6@1171.57,1480 1171.57,1373.42 1185,1360 Q1_H3.5
  Bottom w20: J2.6@1171.57,1480 1171.57,1556.57 D2_H3.A
ACT6: D1_H4.A J2.4 Q1_H4.7 Q1_H4.8 | length 341.7
  Top w20: J2.4 1369.72,1329.84 Q1_H4.8@1430,1269.57
  Bottom w20: J2.4 1369.72,1395.28 D1_H4.A
ACT7: D2_H4.A J2.2 Q1_H4.5 Q1_H4.6 | length 325.7
  Top w20: J2.2 1566.57,1373.42 1580,1360 Q1_H4.5
  Bottom w20: J2.2 1566.57,1556.57 D2_H4.A
ACT8: D1_H5.A J3.8 Q1_H5.7 Q1_H5.8 | length 341.7
  Top w20: J3.8@99.72,1480.43 99.72,1330.28 Q1_H5.8@160,1270
  Bottom w20: J3.8@99.72,1480.43 99.72,1395.71 D1_H5.A
ACT9: D2_H5.A J3.6 Q1_H5.5 Q1_H5.6 | length 325.7
  Top w20: J3.6@296.57,1480.43 296.57,1373.86 310,1360.43 Q1_H5.5
  Bottom w20: J3.6@296.57,1480.43 296.57,1557.01 D2_H5.A
ACT10: D1_H6.A J3.4 Q1_H6.7 Q1_H6.8 | length 341.7
  Top w20: J3.4 489.72,1329.84 Q1_H6.8@550,1269.57
  Bottom w20: J3.4 489.72,1395.28 D1_H6.A
ACT11: D2_H6.A J3.2 Q1_H6.5 Q1_H6.6 | length 325.7
  Top w20: J3.2 686.57,1373.42 700,1360 Q1_H6.5
  Bottom w20: J3.2 686.57,1556.57 D2_H6.A
B0: U1.42 U4_G1.3 | length 1130
  Top w10: v1(488.7,750) 590,750 750,590 1335,590 1335.16,589.84 U1.42
  Bottom w10: U4_G1.3 488.7,705.71 v1(488.7,750)
B1: U1.43 U4_G1.4 | length 1052.7
  Top w10: v1(515,615) 650,615 704,561 1346,561 1355.16,570.16 U1.43
  Bottom w10: v1(515,615) U4_G1.4
B2: U1.45 U4_G1.5 | length 1026.1
  Top w10: v1(570,585) 630,585 670,545 1427.59,545 1439.02,533.57 1471.79,533.57 U1.45
  Bottom w10: U4_G1.5 565,590 v1(570,585)
B3: U1.46 U4_G1.6 | length 1019.3
  Top w10: v1(615,529) 1420.96,529 1432.39,517.57 1435.34,517.57 1439.02,513.88 1469.58,513.88 U1.46@1473.46,510
  Bottom w10: v1(615,529) U4_G1.6
B4: U1.39 U4_G2.3 | length 550.6
  Top w10: v1(1015,620) 1015,627.79 1057.2,670 1335,670 1353.32,651.68 1471.79,651.68 U1.39
  Bottom w10: v1(1015,620) U4_G2.3
B5: U1.40 U4_G2.4 | length 494.7
  Top w10: v1(1060,620) 1090,650 1300,650 1320.79,629.21 U1.40
  Bottom w10: v1(1060,620) 1065,625 U4_G2.4
B6: U1.41 U4_G2.5 | length 420.9
  Top w10: v1(1115,620) 1120,620 1130.47,609.53 U1.41
  Bottom w10: v1(1115,620) U4_G2.5
B7: U1.18 U4_G2.6 | length 802.6
  Top w8: v1(1569.59,486.81) 1569.59,485.41 1730.41,485.41 1745,500 1745,555 1760.16,570.16 U1.18
  Bottom w8: U4_G2.6 1165,635 1205,595 1430,595 1538.19,486.81 v1(1569.59,486.81)
B8: U1.13 U4_G3.3 | length 669.3
  Top w8: v1(1795.43,407.51) U1.13
  Bottom w8: v1(1795.43,407.51) 1815.01,407.51 1822.52,400 2030,400 2260.31,630.31 U4_G3.3
B9: U1.12 U4_G3.4 | length 773
  Top w8: U1.12 1743.27,386.73 1765,365 v1(1770,365)
  Bottom w8: v1(1770,365) 1770,361.82 1771.82,360 1788.08,376.26 2036.26,376.26 2270,610 2300,610 2310,620 U4_G3.4@2310,672.32
  Bottom w10: U4_G3.4@2310,672.32 U4_G3.4
B10: U1.11 U4_G3.5 | length 888.7
  Top w8: U1.11 1723.58,346.42 v1@1736.29,333.71
  Bottom w8: v1@1738.51,335 1779.68,335 1799.68,355 2050,355 2285,590 2340,590 2360.31,610.31 U4_G3.5
  other v1: 1738.51,335.93
B11: U1.10 U4_G3.6 | length 1028.5
  Top w8: v1@1703.9,300.01 U1.10
  Bottom w8: v1(1715,300) 1769.21,300 1804.53,335.31 2070.31,335.31 2295,560 2400,560 2410.31,570.31 U4_G3.6
C0: Q1_H1.2 R1_H1.1 U1.17 | length 727.6
  Top w8: U1.17 1935.47,550.47 v1(1975,590)
  Top w10: v1(1961.5,946.93) R1_H1.1
  Top w20: R1_H1.1 1965,995.91 Q1_H1.2@1965,1053.46
  Bottom w8: v1@1959.78,945.22 2050,855 2050,665 v1(1975,590)
C1: Q1_H1.4 R2_H1.1 U1.16 | length 759.6
  Top w8: U1.16 1965.79,530.79 1980,545 v1(1980,550)
  Top w10: v1@2091.5,945 R2_H1.1
  Top w20: Q1_H1.4@2065,1053.46 2091.5,1026.97 R2_H1.1
  Bottom w8: v1(1980,550) 2075,645 2075,895 2095,915 2095,940 v1(2090,945)
C2: Q1_H2.2 R1_H2.1 U1.15 | length 969.8
  Top w8: U1.15 2006.1,511.1 v1(2015,520) ; v1(2351.5,940.06) R1_H2.1
  Top w20: R1_H2.1 2355,995.91 Q1_H2.2
  Bottom w8: v1(2015,520) 2095,600 2095,806.99 2172.83,884.81 2296.24,884.81 v1(2351.5,940.06)
C3: Q1_H2.4 R2_H2.1 U1.14 | length 1129.4
  Top w8: U1.14 2046.42,491.42 v1(2050,495)
  Top w10: v1(2481.5,945) R2_H2.1
  Top w20: Q1_H2.4 2481.5,1026.97 R2_H2.1
  Bottom w8: v1(2050,495) 2120,565 2120,797.25 2182.62,859.87 2394.87,859.87 2480,945 v1(2481.5,945)
C4: Q1_H3.2 R1_H3.1 U1.26 | length 1140.3
  Top w8: U1.26 1725,741.85 v1(1725,823.59)
  Top w10: 1081.5,950 R1_H3.1
  Top w20: R1_H3.1 1085,995.47 Q1_H3.2
  Bottom w8: v1(1080,933.74) 1080,980 1090,990 1310,990 1397.82,902.18 1554.39,902.18 1575,881.57 1575,860 1575,760 1600,735 1710,735 1725,750 v1(1725,823.59)
C5: Q1_H3.4 R2_H3.1 U1.28 | length 816.9
  Top w8: U1.28 v1(1684.21,809.59)
  Top w10: R2_H3.1 1353.03,991.97 v1(1355,990)
  Top w20: Q1_H3.4 1211.5,1026.53 R2_H3.1
  Bottom w8: v1(1355,990) 1420.69,924.3 1565.69,924.3 1600,890 1600,785 1625,760 1664.21,760 1684.21,780 v1(1684.21,809.59) v1@1691.76,809.59
C6: Q1_H4.2 R1_H4.1 U1.20 | length 1030.4
  Top w10: R1_H4.1 1506.77,961.7 v1(1506.77,952.47) ; U1.20 1879.53,609.53 v1(1890,620)
  Top w20: R1_H4.1 1480,995.47 Q1_H4.2
  Bottom w10: v1(1506.77,952.47) 1516,952.47 1553.53,990 1775,990 1890,875 1945,875 1980,840 1980,695 1905,620 v1(1890,620)
C7: Q1_H4.4 R2_H4.1 U1.19 | length 967.8
  Top w8: U1.19 1910.16,589.84 v1(1915,585)
  Top w10: R2_H4.1 1828.03,991.97 v1(1830,990)
  Top w20: Q1_H4.4 1606.5,1026.53 R2_H4.1
  Bottom w10: v1(1830,990) 1830,970 1905,895 1965,895 2005,855 2005,675 v1(1915,585)
C8: Q1_H5.2 R1_H5.1 U1.21 | length 1871.5
  Top w8: 206.5,946.93 293.42,860 1065,860 1225,700 v1(1370,700) ; v1(1725,595) 1725,620 1734.21,629.21 U1.21
  Top w10: 206.5,946.93 R1_H5.1
  Top w20: R1_H5.1 210,995.91 Q1_H5.2
  Bottom w8: v1(1370,700) 1425,700 1530,595 v1(1725,595)
C9: Q1_H5.4 R2_H5.1 U1.22 | length 1735.6
  Top w8: 336.5,941.93 388.42,890 1080,890 1230,740 v1(1445,740) ; v1(1680,620) 1680,635 1693.9,648.9 U1.22
  Top w10: 336.5,941.93 R2_H5.1
  Top w20: Q1_H5.4 336.5,1026.97 R2_H5.1
  Bottom w8: v1(1445,740) 1450,740 1570,620 v1(1680,620)
C10: Q1_H6.2 R1_H6.1 U1.27 | length 1427.6
  Top w8: U1.27 1703.9,681.1 v1(1705,680)
  Top w10: v1@596.5,946.5 R1_H6.1
  Top w20: R1_H6.1 600,995.47 Q1_H6.2
  Bottom w8: v1(595,936.72) 595,940 600,945 666.57,878.42 1306.57,878.42 1410,775 1475,775 1565,685 1610,685 1645,650 1690,650 1705,665 v1(1705,680)
C11: Q1_H6.4 R2_H6.1 U1.29 | length 1245.9
  Top w8: U1.29 1664.53,680.47 v1(1665,680)
  Top w10: v1@726.5,941.5 R2_H6.1
  Top w20: Q1_H6.4 726.5,1026.53 R2_H6.1
  Bottom w8: v1@730,940 726.72,936.72 v1(726.72,933.74) 755.46,905 1335,905 1435,805 1490,805 1585,710 1655,710 1665,700 v1(1665,680)
CB: C5.1 U2.1 | length 86.1
  Bottom w20: U2.1 C5.1
FB: R3.1 R4.1 U2.3 | length 144.6
  Bottom w10: R4.1@2601.73,1095 R4.1@2610,1095
  Bottom w20: R4.1@2610,1095 2630,1115 2640.75,1115 U2.3 R3.1
GND: C1.2 C2.2 C3.2 C4.2 C6_G1.1 C6_G2.1 C6_G3.1 C7_G1.1 C7_G2.1 C7_G3.1 C10_G1.2 C10_G2.2 C10_G3.2 C11.1 C12.1 C13.2 D3.A J7.1 P2.3 Q1_H1.1 Q1_H1.3 Q1_H2.1 Q1_H2.3 Q1_H3.1 Q1_H3.3 Q1_H4.1 Q1_H4.3 Q1_H5.1 Q1_H5.3 Q1_H6.1 Q1_H6.3 R1_H1.2 R1_H2.2 R1_H3.2 R1_H4.2 R1_H5.2 R1_H6.2 R2_H1.2 R2_H2.2 R2_H3.2 R2_H4.2 R2_H5.2 R2_H6.2 R4.2 U1.8 U1.23 U1.35 U1.44 U1.47 U2.2 U3.2 U3.5 U4_G1.2 U4_G1.8 U4_G2.2 U4_G2.8 U4_G3.2 U4_G3.8 | length 5098.1
  Top w8: v1(1375,426.18) 1356.02,426.18 1337.2,445 C4.2 1337.2,500 1347.2,510 1416.72,510 1435.31,491.42 U1.47 ; U1.44 1524.53,550.47 v1(1540,535) ; U1.35 1546.42,869.84 1566.57,890 v1(1636.77,890) ; v1(1600.95,316.44) 1608.17,316.44 1664.53,372.79 U1.8 ; U1.23 1838.82,668.58 1855,684.76 C2.2 1932.3,684.76 1947.53,700 v1(1947.53,725.2)
  Top w20: v2(90,1054.44) 90.97,1053.46 Q1_H5.1 143.5,1036.97 R1_H5.2 ; Q1_H5.3 260,1020.43 273.5,1006.93 R2_H5.2 273.5,935.24 v2(275,933.74) ; v2(480,1055.43) 482.4,1053.03 Q1_H6.1 533.5,1036.53 R1_H6.2 ; Q1_H6.3 650,1020 663.5,1006.5 R2_H6.2 663.5,933.96 v2(663.72,933.74) ; v2(965.97,1054.44) 967.37,1053.03 Q1_H3.1 1018.5,1036.53 R1_H3.2 ; Q1_H3.3 1135,1020 1148.5,1006.5 R2_H3.2 1148.5,956.5 1165,940 v2(1265,940) ; v2(1360,1054.44) 1361.41,1053.03 Q1_H4.1 1413.5,1036.53 R1_H4.2 ; Q1_H4.3 1530,1020 1543.5,1006.5 R2_H4.2 1543.5,953.5 1550.08,946.93 v2(1663.48,946.93) 1576.45,946.93 ; v2(1845,1054.44) 1845.97,1053.46 1915,1053.46 1898.5,1036.97 R1_H1.2 ; Q1_H1.3@2015,1053.46 2015,1020.43 2028.5,1006.93 R2_H1.2 v2(2028.5,933.74) ; v2(2235,1054.44) 2235.97,1053.46 Q1_H2.1 2288.5,1036.97 R1_H2.2 ; Q1_H2.3 2405,1020.43 2418.5,1006.93 R2_H2.2 2418.5,943.61 v2(2414.89,940) ; v2(2536.77,956.5) C12.1
  Bottom w8: C7_G1.1@726.28,762.83 C7_G1.1 ; U4_G2.2 U4_G2.2@965.97,677.97 ; v1(1375,426.18) 1424.92,376.26 C1.2 1454.81,345 1481.28,318.53 1482.75,320 1484.22,318.53 1486.09,320.39 1490.04,316.44 v1(1600.95,316.44) ; R4.2@2536.08,1094.31 R4.2 ; 2536.77,1152.32 2540,1155.55 ; U3.5 U3.5@2857.01,910.71 ; J7.1 2951.5,778.5 C13.2
  Bottom w15: 2695,1110 U2.2 ; v2(2790.93,973.3) 2828.74,973.3 2856.3,945.74 U3.5
  Bottom w20: U4_G1.2 v2(415,824.84) ; U4_G1.8 715,725 726.72,736.72 C7_G1.1 ; C7_G1.1@726.28,762.83 C6_G1.1 v2(800.19,825.58) ; U4_G2.2@965.97,677.97 C10_G2.2 v2(965.97,821.79) ; U4_G2.8 1265,722.4 1277.28,734.68 C7_G2.1 C6_G2.1 1304.65,824.46 v2(1344.15,784.96) ; U4_G3.2 2210.31,717.52 2227.48,734.68 C10_G3.2 2227.48,777.76 2244.72,795 v2(2244.72,818.9) ; U4_G3.8 2510.31,781.65 C6_G3.1 2473.07,888.07 v2@2530,945 ; v3(2536.08,1034.77) R4.2@2536.08,1094.31 ; R4.2 2536.77,1152.32 ; 2540,1155.55 C11.1 C11.1@2568.27,1143.82 ; U3.2@2640,810 2680,810 2705.2,835.2 v2(2734.73,835.2) ; 2695,1110 2721.58,1083.42 v3(2790.93,1083.42) ; v3(2820,1415) 2845.05,1415 2882.83,1377.22 D3.A 2870,1322.16 2870,1310 v3(2855,1295)
GNDISO_G1: C8_G1.1 C9_G1.1 J4.1 J4.3 J4.5 J4.7 U4_G1.9 U4_G1.10 U4_G1.15 | length 806
  Top w8: v1(415,365) v1@415,371.05
  Top w20: C9_G1.1 381.47,469.82 391.3,460 391.3,376.57 402.87,365 v1(415,365)
  Bottom w20: v1(152.93,245) 171.43,263.5 C8_G1.1 295.38,263.5 312.29,246.59 398.09,246.59 415,263.5 U4_G1.15 v1(415,365) ; J4.7@665,195.55 U4_G1.10 ; J4.7 715,204.45 U4_G1.9
GNDISO_G2: C8_G2.1 C9_G2.1 J5.1 J5.3 J5.5 J5.7 U4_G2.9 U4_G2.10 U4_G2.15 | length 641.4
  Top w20: C9_G2.1 946.12,428.76 946.12,376.87 v1(961.5,361.5)
  Bottom w15: C8_G2.1 937.6,137.6 J5.1 975,225 965,235 U4_G2.15 ; U4_G2.15@961.5,298.5 v1(961.5,361.5)
  Bottom w20: U4_G2.10 1215,370 1230,385 v1(1265,385) U4_G2.9
GNDISO_G3: C8_G3.1 C9_G3.1 J6.1 J6.3 J6.5 J6.7 U4_G3.9 U4_G3.10 U4_G3.15 | length 682.7
  Top w20: v1(2248.7,360) 2248.7,393.6 C9_G3.1@2255,399.9
  Bottom w8: 2036.26,220 2036.5,220.23
  Bottom w20: 2036.26,220 2051.85,204.41 J6.3 ; 2036.5,220.23 C8_G3.1 2087.47,250 2103.79,233.68 2198.99,233.68 2210.31,245 U4_G3.15 2210.31,335.31 2235,360 v1(2248.7,360) ; J6.7 2445.55,226.11 2460.31,240.87 U4_G3.10 ; U4_G3.9 2510.31,325.31 2546.45,361.45 v1(2573.4,361.45)
NRST: P2.5 U1.7 | length 1774.9
  Top w8: U1.7 1644.84,381.29 1630.61,367.05 1575.49,367.05 1555,346.57 1555,295.44 1575.43,275 1995,275 2233.88,513.88 2601.12,513.88 2640,475 2640,250 2695,195 P2.5
RS485-A: J7.2 R5.2 U3.6 | length 187.6
  Bottom w10: U3.6 2931.57,860 J7.2 2965.08,893.5 R5.2
RS485-B: J7.3 R5.1 U3.7 | length 475.6
  Bottom w8: U3.7 2890.56,810 2910.39,829.83 3057.36,829.83 3081.5,853.98 3081.5,939.01 3064.02,956.5 R5.1
  Bottom w10: J7.3 3009.65,976.85 R5.1
SW: C5.2 D3.C L1.1 U2.6 | length 508.5
  Top w20: v3(2690,1320) 2650,1280 2650,1268.27 2793.27,1268.27 v3(2795,1270)
  Bottom w15: U2.6 D3.C@2732.4,1330.24
  Bottom w20: v3(2690,1320) 2700.24,1330.24 D3.C@2732.4,1330.24 ; U2.6 2756.53,1238.15 ; v3(2795,1270) 2763.15,1238.15 2756.53,1238.15 ; C5.2 2799.82,1194.86 2756.53,1238.15
SWCLK: P2.2 U1.37 | length 1528.8
  Top w8: U1.37 1531.73,688.27 1545,675 1545,625 v1(1652.43,517.57) ; v1(1875,450) 1920,405 2055,405 2207.22,557.22 2617.78,557.22 2680,495 P2.2
  Bottom w8: v1(1652.43,517.57) 1652.43,512.57 1695,470 1855,470 v1(1875,450)
SWDIO: P2.4 U1.34 | length 1807
  Top w8: U1.34 1566.1,648.9 v1(1703.9,511.1) ; v1(1931.33,460.8) 1957.13,435 2045,435 2187.81,577.81 2632.3,577.81 2667.51,542.6 2797.4,542.6 2830,510 2830,345 2780,295 P2.4 P2.4@2740,295
  Bottom w8: v1(1703.9,511.1) 1730,485 1907.13,485 v1(1931.33,460.8)
SWO: P2.6 U1.38 | length 1992.3
  Top w8: U1.38 1526.42,668.58 1530,665 1530,592.5 1599.1,523.39 v1(1600.95,523.39) ; v1(1835,425) 1885,375 2060,375 2220.76,535.76 2604.24,535.76 2670,470 2670,280 2705,245 2795,245 2820,220 2820,160 2765,105 P2.6
  Bottom w8: 1617.5,505 v1@1600.95,521.55 ; v1(1835,425) 1810,450 1672.5,450 v1@1600.95,521.55 ; v1@1600.95,521.55 v1(1600.95,523.39) v1@1600.95,521.55
USART1_RX: U1.31 U3.1 | length 1288.8
  Top w10: U1.31 1625.16,823.59 1703.75,902.18 2572.82,902.18 2600,875 2600,780 v1(2580,760)
  Bottom w10: v1(2580,760) U3.1
USART1_TX: U1.30 U3.4 | length 1120.9
  Top w8: U1.30 1644.84,809.84 1718.47,883.47 2546.52,883.47 v1(2560,870)
  Bottom w10: v1(2560,870) 2600,910 U3.4
USART1_TX_EN: U1.25 U3.3 | length 1031
  Top w8: U1.25 1774.57,740.43 1810,775.87 1810,795 1810,824.84 1851.26,866.1 2508.89,866.1 v1(2565,810)
  Bottom w10: v1(2565,810) 2565,820 2605,860 U3.3
VFUSED: C11.2 D1_H1.C D1_H2.C D1_H3.C D1_H4.C D1_H5.C D1_H6.C D2_H1.C D2_H2.C D2_H3.C D2_H4.C D2_H5.C D2_H6.C F1.2 J1.1 J1.3 J1.5 J1.7 J2.1 J2.3 J2.5 J2.7 J3.1 J3.3 J3.5 J3.7 U2.4 U2.5 | length 1671.8
  Bottom w15: U2.4 2657.6,1286.77 2638.37,1306 2638.37,1332.07 2670,1363.7 F1.2@2670,1509.33
  Bottom w20: v2(90,1580.43) D2_H5.C ; D1_H5.C v2(360,1380.43) ; v2(480,1580) D2_H6.C ; D1_H6.C v2(750,1380) ; v2(965,1580) D2_H3.C ; D1_H3.C v2(1235,1380) ; v2(1360,1580) D2_H4.C ; D1_H4.C v2(1630,1380) ; v2(1845,1580.43) D2_H1.C ; D1_H1.C v2(2115,1380.43) ; v2(2235,1580.43) D2_H2.C ; D1_H2.C v2(2505,1380.43) ; v3(2505,1222.85) 2506.6,1224.45 C11.2 ; v3(2560.04,1285.06) 2580,1265.1 C11.2 ; v3(2600,1600) 2650,1600 2670,1580 F1.2@2670,1530 ; F1.2@2655,1545 F1.2@2670,1530 ; F1.2@2670,1509.33 F1.2@2670,1530 ; F1.2@2680,1520 F1.2@2670,1530 ; U2.5 U2.4 2593.7,1238.15 C11.2
VHIGH: F1.1 J7.4 | length 352.4
  Bottom w20: v3@2875.12,1469.88 v3(3051.48,1469.88) ; v3@2875.43,1580.43 v3(3051.48,1580.43)
  other v3: 2875,1470 2875,1580
VISO_G1: C8_G1.2 C9_G1.2 R6_G1.1 R7_G1.1 R8_G1.1 R9_G1.1 U4_G1.16 | length 618.5
  Top w20: v1(350,365) C9_G1.2@350,406.63 ; R6_G1.1@449.42,470.44 675.11,470.44 685.55,460 v1(685.55,419.57)
  Bottom w20: v1(152.93,295) 184.43,326.5 C8_G1.2 302.53,326.5 321.03,307.99 U4_G1.16 365,350 v1(350,365)
VISO_G2: C8_G2.2 C9_G2.2 R6_G2.1 R7_G2.1 R8_G2.1 R9_G2.1 U4_G2.16 | length 578.1
  Top w20: v1@904.38,360.62 C9_G2.2 ; R6_G2.1 R7_G2.1 R8_G2.1 R9_G2.1 1219.5,470.5 1230,460 v1(1230,425)
  Bottom w8: C8_G2.2 C8_G2.2@882.14,213.73
  Bottom w15: v1(882.14,288.9) 882.14,213.73 915,246.59 U4_G2.16
  Bottom w20: v1(905,360) 915,350 U4_G2.16
VISO_G3: C8_G3.2 C9_G3.2 R6_G3.1 R7_G3.1 R8_G3.1 R9_G3.1 U4_G3.16 | length 707.9
  Top w20: v1(2187.52,361.5) 2187.52,395.42 C9_G3.2 ; R6_G3.1 R7_G3.1 2543.37,471.63 2565,450 v1(2565,419.57)
  Bottom w8: U4_G3.16@2157.91,295.58 U4_G3.16
  Bottom w20: v1(1905.75,228.9) 1913.9,228.9 1935,250 C8_G3.2 1973.5,281.98 1987.11,295.58 U4_G3.16@2157.91,295.58 ; U4_G3.16 2160.31,345.31 2176.5,361.5 v1(2187.52,361.5)
pads on no net: U1.2 U1.3 U1.4 U1.5 U1.6 U1.32 U1.33

## Polygon pours and split planes (outlines as drawn)
GNDISO_G1 on InternalPlane1 (split plane): 824.93,40 825.22,37.06 826.07,34.23 827.47,31.63 829.34,29.34 838.59,20.1 20.1,20.1 20.1,449.93 824.93,449.93
GND on InternalPlane1 (split plane): 3109.9,20.1 2635.07,20.1 2635.07,465 2634.78,467.94 2633.92,470.77 2632.53,473.37 2630.66,475.66 2628.37,477.53 2625.77,478.92 2622.94,479.78 2620,480.07 2235,480.07 2232.06,479.78 2229.23,478.92 2226.63,477.53 2224.34,475.66 2028.76,280.07 1780,280.07 1777.06,279.78 1486.53,279.78 1290.66,475.66 1288.37,477.53 1285.77,478.92 1282.94,479.78 1280,480.07 20.1,480.07 20.1,1634.9 3109.9,1634.9
GNDISO_G3 on InternalPlane1 (split plane): 2604.93,20.1 1795.07,20.1 1795.07,249.93 2035,249.93 2037.94,250.22 2040.77,251.07 2043.37,252.47 2045.66,254.34 2241.24,449.93 2604.93,449.93
GNDISO_G2 on InternalPlane1 (split plane): 1469.63,254.05 1471.92,252.18 1474.52,250.78 1477.35,249.93 1480.29,249.64 1764.93,249.64 1764.93,20.1 881.22,20.1 855.07,46.24 855.07,449.93 1273.76,449.93
3.3V on InternalPlane2 (split plane): 2834.93,975 2835.22,972.06 2836.07,969.23 2837.47,966.63 2839.34,964.34 2841.63,962.47 2844.23,961.07 2847.06,960.22 2850,959.93 3105,959.93 3107.94,960.22 3109.9,960.81 3109.9,20.1 2635.07,20.1 2635.07,465 2634.78,467.94 2633.92,470.77 2632.53,473.37 2630.66,475.66 2628.37,477.53 2625.77,478.92 2622.94,479.78 2620,480.07 2235,480.07 2232.06,479.78 2229.23,478.92 2226.63,477.53 2224.34,475.66 2028.76,280.07 1780,280.07 1777.06,279.78 1486.53,279.78 1290.66,475.66 1288.37,477.53 1285.77,478.92 1282.94,479.78 1280,480.07 888.23,480.07 885.77,481.39 882.94,482.25 880,482.54 20.1,482.54 20.1,1119.93 2834.93,1119.93
VISO_G1 on InternalPlane2 (split plane): 824.93,40 825.22,37.06 826.07,34.23 827.47,31.63 829.34,29.34 838.59,20.1 20.1,20.1 20.1,452.39 824.93,452.39
VFUSED on InternalPlane2 (split plane): 2754.93,1456.24 2638.76,1340.07 2530,1340.07 2527.06,1339.78 2524.23,1338.92 2521.63,1337.53 2519.34,1335.66 2459.34,1275.66 2457.47,1273.37 2456.07,1270.77 2455.22,1267.94 2454.93,1265 2454.93,1150.07 20.1,1150.07 20.1,1634.9 2754.93,1634.9
VISO_G2 on InternalPlane2 (split plane): 1469.63,254.05 1471.92,252.18 1474.52,250.78 1477.35,249.93 1480.29,249.64 1764.93,249.64 1764.93,20.1 881.22,20.1 855.07,46.24 855.07,449.93 1273.76,449.93
VISO_G3 on InternalPlane2 (split plane): 2604.93,20.1 1795.07,20.1 1795.07,249.93 2035,249.93 2037.94,250.22 2040.77,251.07 2043.37,252.47 2045.66,254.34 2241.24,449.93 2604.93,449.93
VHIGH on InternalPlane2 (split plane): 3109.9,1001.22 3098.76,990.07 2865.07,990.07 2865.07,1135 2864.78,1137.94 2863.92,1140.77 2862.53,1143.37 2860.66,1145.66 2858.37,1147.53 2855.77,1148.92 2852.94,1149.78 2850,1150.07 2485.07,1150.07 2485.07,1258.76 2536.24,1309.93 2645,1309.93 2647.94,1310.22 2650.77,1311.07 2653.37,1312.47 2655.66,1314.34 2780.66,1439.34 2782.53,1441.63 2783.92,1444.23 2784.78,1447.06 2785.07,1450 2785.07,1634.9 3109.9,1634.9

## Keep-outs
Keep-Out Layer:
  the board outline again, w10

## Other copper
InternalPlane1 (plane layer: these items are gaps in the copper):
  lines w30: 0,465 880,465 ; 880,0 840,40 840,465 1280,465 1480.29,264.71 1778.05,264.71 ; 1780,0 1780,265 2035,265 2235,465 2620,465 2620,0
InternalPlane2 (plane layer: these items are gaps in the copper):
  lines w30: 0,467.46 880,467.46 ; 0,1135 2480,1135 ; 880,0 840,40 840,465 1280,465 1480.29,264.71 1778.05,264.71 ; 1780,0 1780,265 2035,265 2235,465 2620,465 2620,0 ; 2770,1655 2770,1450 2645,1325 2530,1325 2470,1265 2470,1135 2850,1135 2850,975 3105,975 3125,995

## Silkscreen, mask and mechanical layers (free items; w line width, h text height)
Top Overlay:
  text "Actuator Board" at 174.01,589.84 h60
  text "R3 - 2016" at 1795.43,589.84 h60
Bottom Overlay:
  text "Rev: Daniel Dugger / Des: Tom Feeney" at 1236.09,1019.39 h60
  text "SubjuGator 2016 / Revision 3" at 2431.53,1012.24 h60
Board Outline - Real:
  lines w10: 0,1655 3130,1655 3130,0 ; -0.02,1654.98 0,1655 ; -0.02,1654.98 -0.02,-0.01 3129.99,-0.01 ; 3129.99,-0.01 3130,0

## Dimensions
3130,1655 to 3130,0 on Mechanical 15
3130,0 to 3010,1275 on Mechanical 15
3010,345 to 3130,0 on Mechanical 15
153,667 to 0,0 on Mechanical 15
0,0 to 153,667 on Mechanical 15
0,0 to 3010,345 on Mechanical 15
0,0 to 3130,0 on Mechanical 15